# Altium PCB Altium.pcbdoc
Units mm, origin at the board's own origin, x right, y up, seen from the top; angles counter-clockwise.
Board outline 115.65 x 115.65 mm, 2 copper layers (Top Layer, Bottom Layer); 18 components, 49 nets, 83 pads, 21 vias.
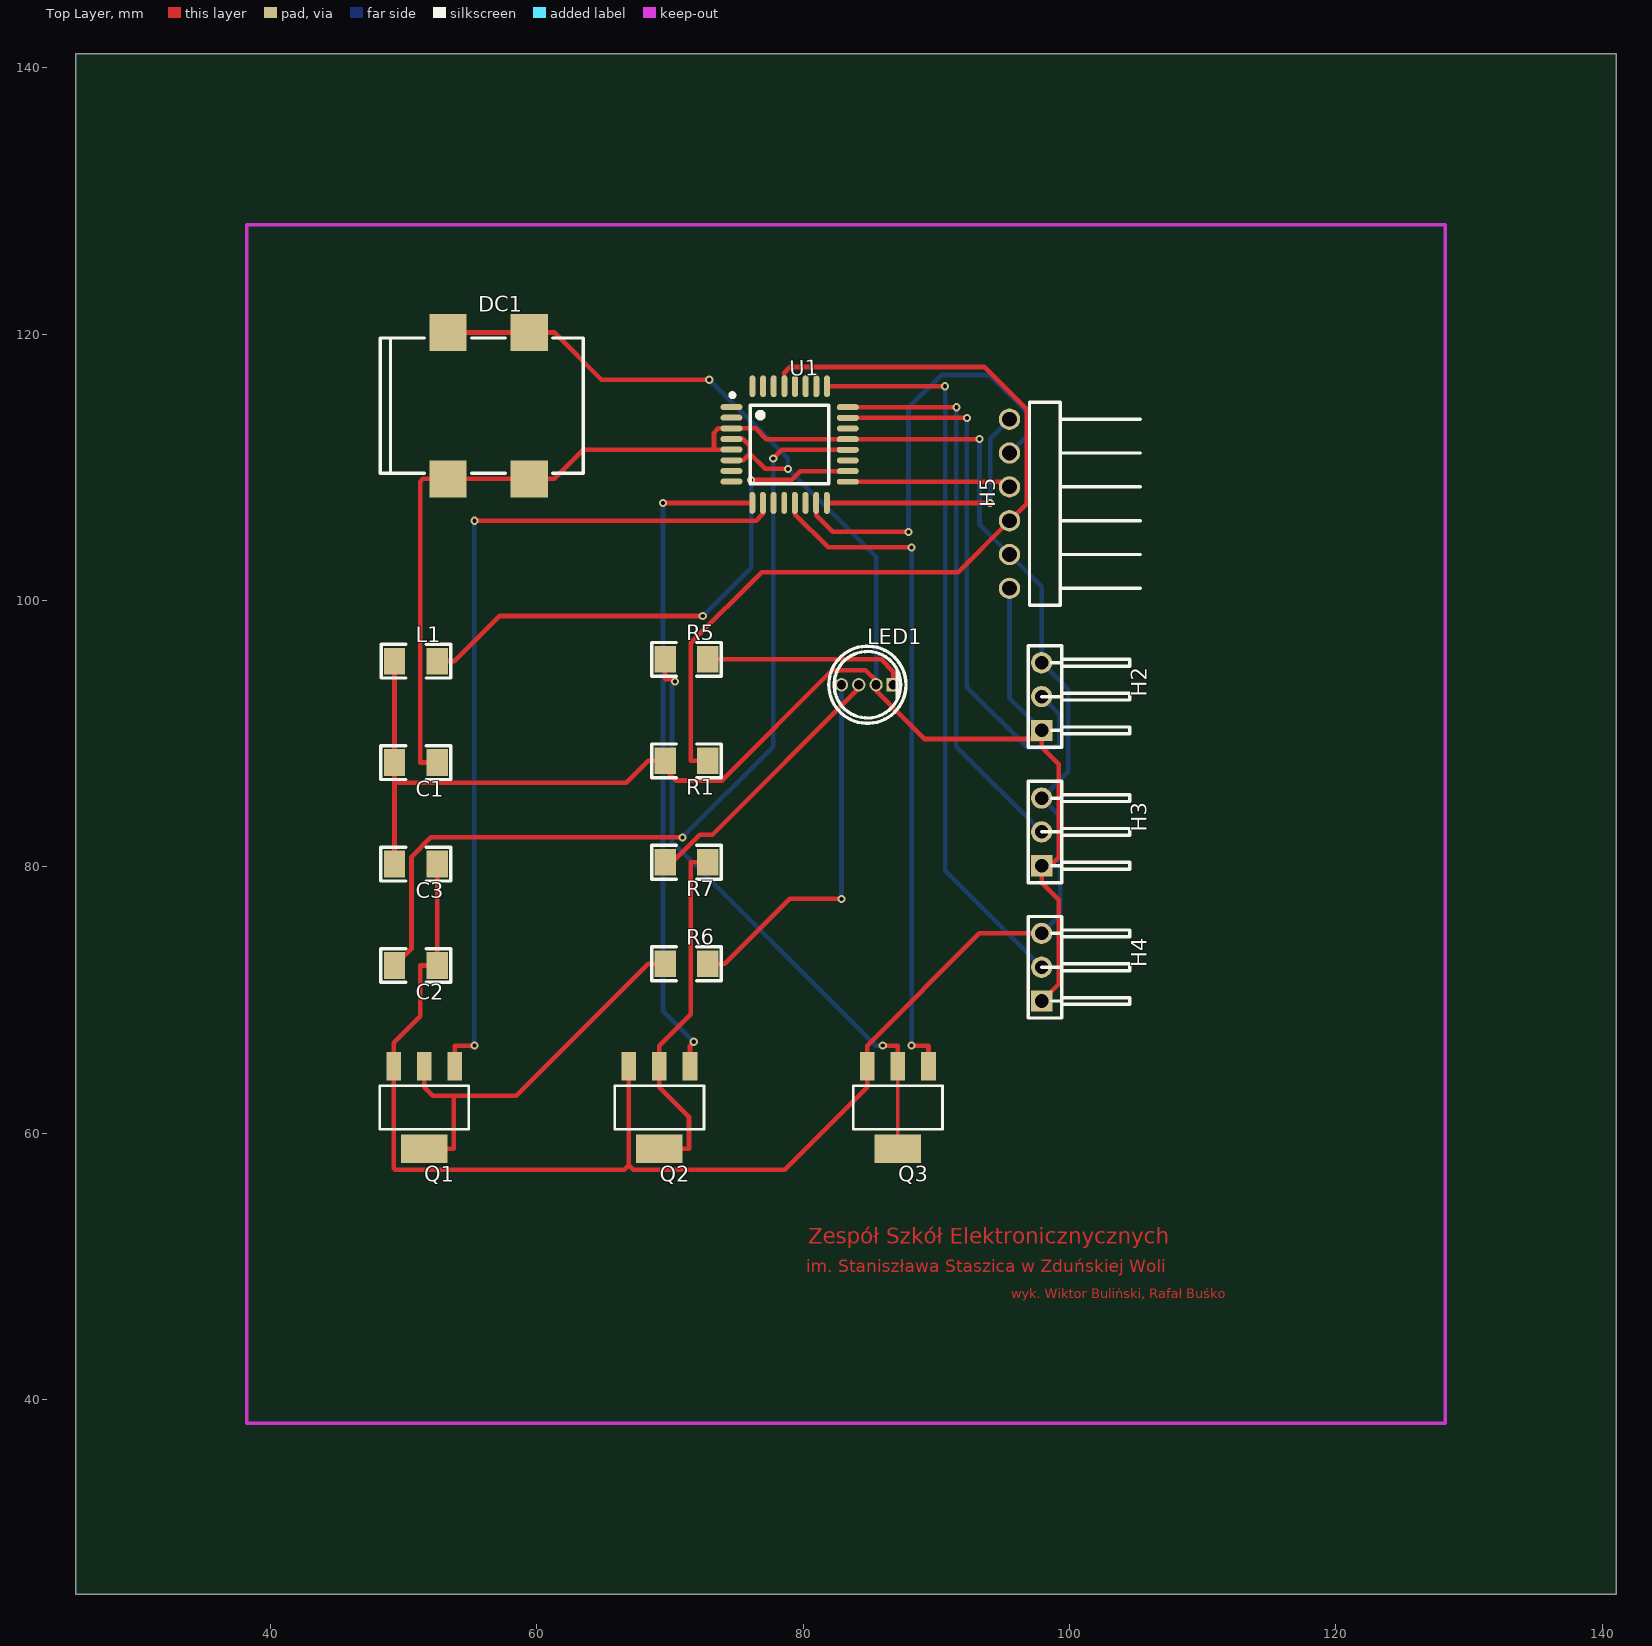
[diagram p0: Top Layer view]
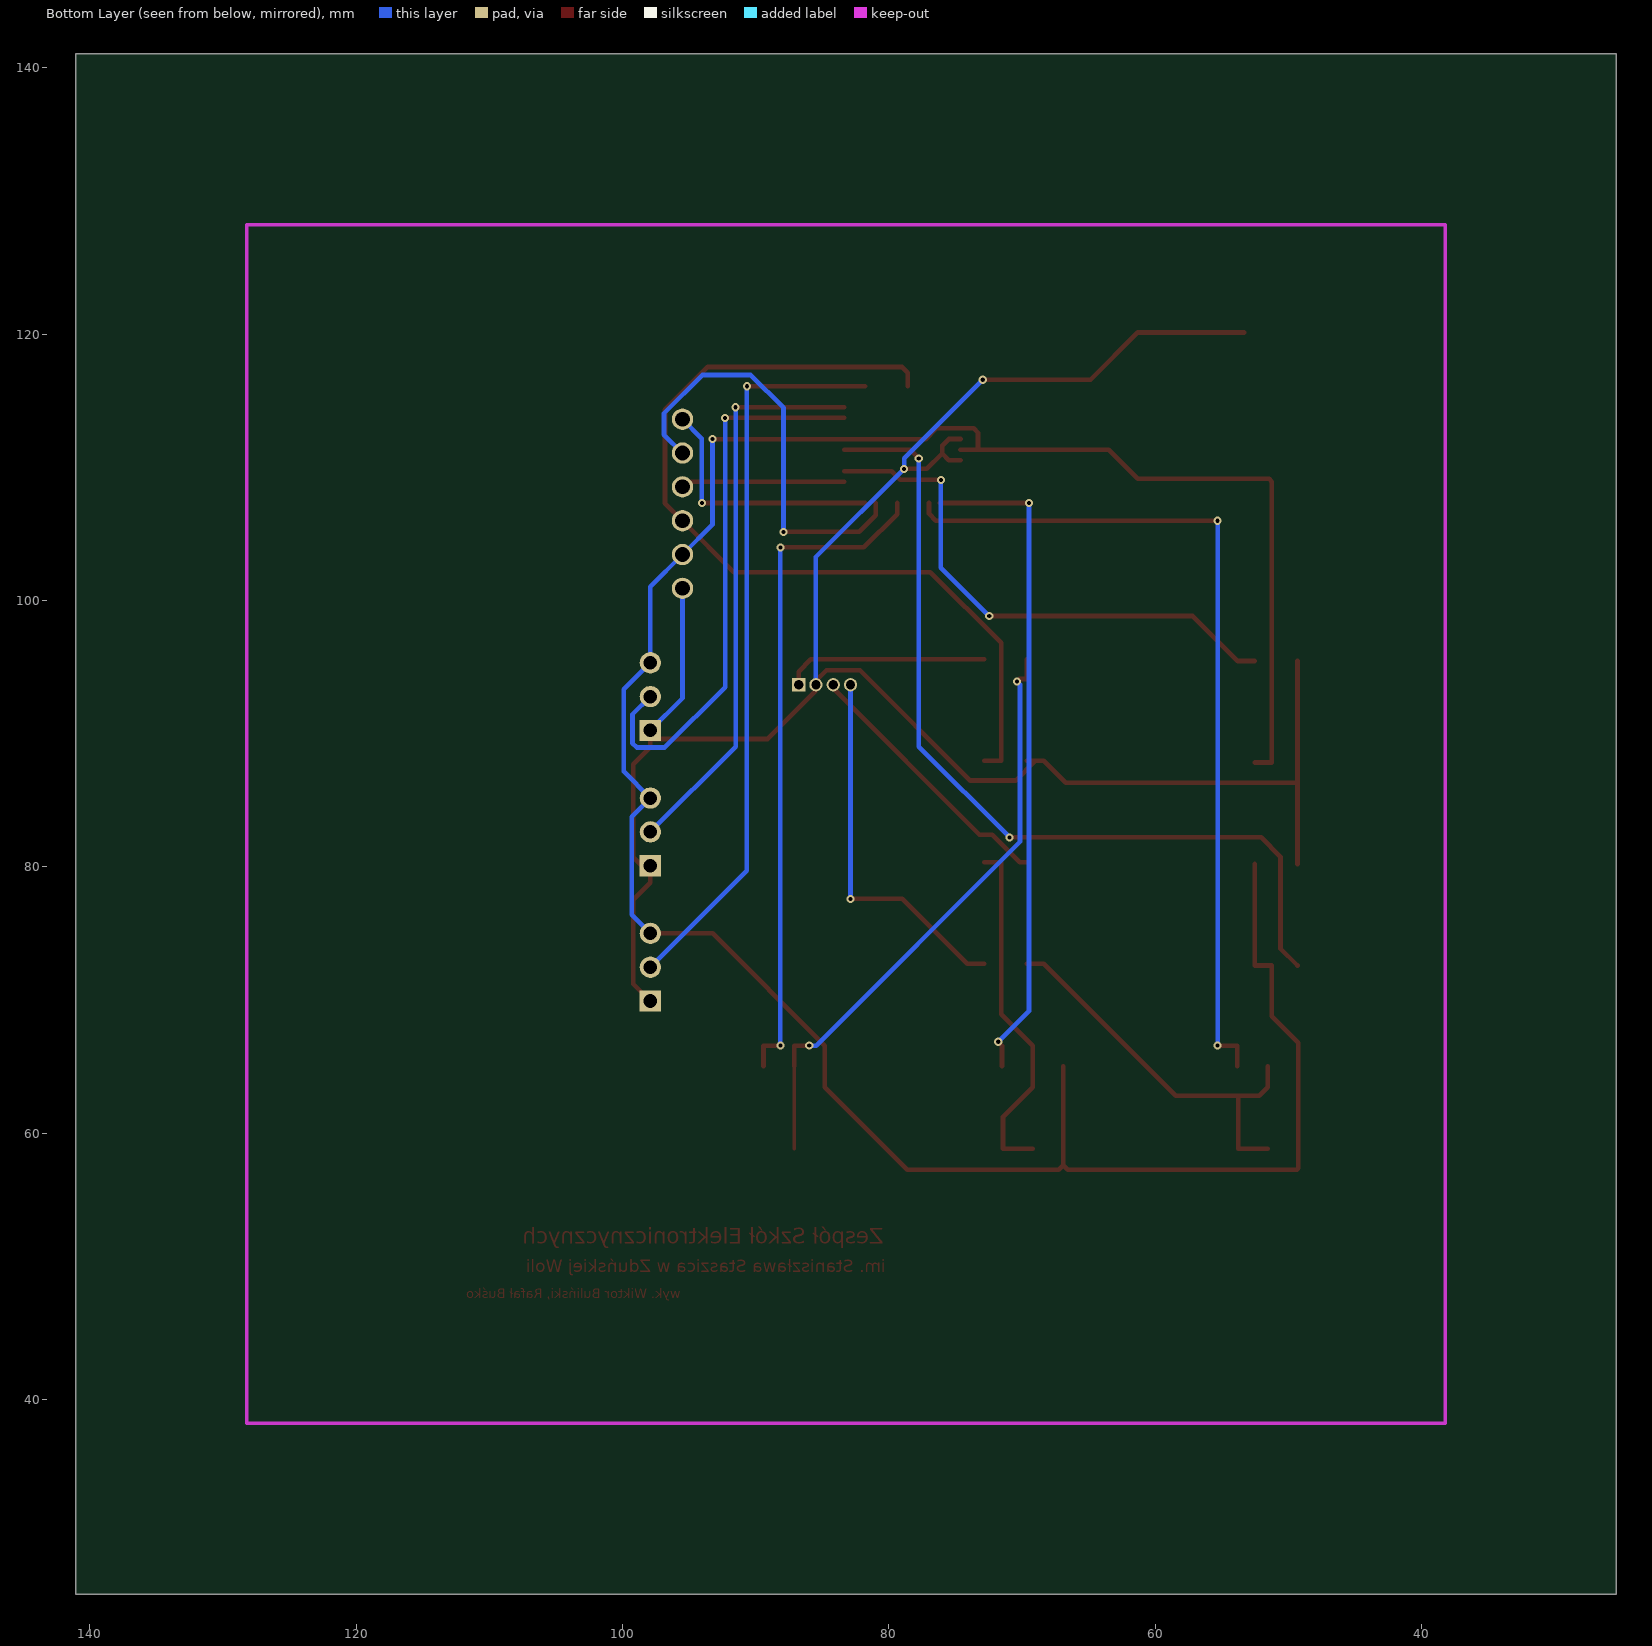
[diagram p1: Bottom Layer view, seen from below]

## Layer stack, top to bottom
Top Layer: signal copper (thickness not stored)
Dielectric: dielectric 0.32, FR-4, Dk 4.8
Bottom Layer: signal copper (thickness not stored)

## Board outline
141.054,25.4 25.4,25.4 25.4,141.054 141.054,141.054

## Components (designator, comment, footprint, x,y, rotation, side; value= is the part's Value field where it differs from the comment)
C1 "100nF" 1206 50.927,87.841 r180 top
C2 "100nF" 1206 50.927,72.601 r180 top
C3 "100nF" 1206 50.927,80.221 r180 top
DC1 "DC-005-5A-2.5-SMT" DC-005-5A-2.0-SMT 56.388,114.638 r0 top
H2 "A2541WR-3P" SIP-2.54MM-3P-CJT-H2.54 97.917,92.794 r270 top
H3 "A2541WR-3P" SIP-2.54MM-3P-CJT-H2.54 97.917,82.634 r270 top
H4 "A2541WR-3P" SIP-2.54MM-3P-CJT-H2.54 97.917,72.474 r270 top
H5 "210R-1*6PCurved needle Reverse bending Gold-plated black" HDR-2.54-1X6PW 95.504,107.272 r90 top
L1 "10uH" 1206 50.927,95.461 r0 top
LED1 "TJ-L5FYTXHMCYLCRGB-A5" LED-DIP-4P(5.8MM) 84.836,93.683 r0 top
Q1 "STN3NF06L" SOT-223 51.562,61.933 r180 top
Q2 "STN3NF06L" SOT-223 69.215,61.933 r180 top
Q3 "STN3NF06L" SOT-223 87.122,61.933 r180 top
R1 "10K" 1206 71.247,87.968 r180 top
R5 "150" 1206 71.247,95.588 r0 top
R6 "100" 1206 71.247,72.728 r0 top
R7 "100" 1206 71.247,80.348 r180 top
U1 "ATMEGA328P-AU" TQFP-32_7X7X08P 78.994,111.717 r0 top

## Footprints (in the part's own frame and the unit in brackets; to place one, negate y for a bottom-side part, rotate by r counter-clockwise, add the part's x,y. Pads: shape width x height; smd on the part's side, far side on the other; paste and mask are expansions set on the pad)
1206 [mm]
  rect 1.6x2 smd: 1(-1.6,0) 2(1.6,0)
  silkscreen extent -2.61,-1.27 2.62,1.27
DC-005-5A-2.0-SMT [mm]
  rect 2.8x2.8 smd: 1(-3.05,5.5) 1(3.05,5.5) 2(-3.05,-5.5) 3(3.05,-5.5)
  silkscreen extent -8.13,-5.08 7.11,5.08
HDR-2.54-1X6PW [mm]
  round 1.6 hole 1.1: 1(-6.35,0) 2(-3.81,0) 3(-1.27,0) 4(1.27,0) 5(3.81,0) 6(6.35,0)
  silkscreen extent -7.62,-9.81 7.62,-1.5
LED-DIP-4P(5.8MM) [mm]
  rect 1x1 hole 0.7: 1(1.95,0)
  round 1 hole 0.7: 2(0.65,0) 3(-0.65,0) 4(-1.95,0)
  silkscreen extent -2.9,-2.9 2.9,2.9
SIP-2.54MM-3P-CJT-H2.54 [mm]
  rect 1.6x1.6 hole 1.02: 1(2.54,0)
  round 1.6 hole 1.02: 2(0,0) 3(-2.54,0)
  silkscreen extent -3.81,-1.02 3.81,6.6
SOT-223 [mil]
  rect 43x85 smd: 1(-90.5,-122) 2(0.5,-122) 3(90.5,-122)
  rect 138x85 smd: 4(0.5,122)
  silkscreen extent -132,-64 132,64
TQFP-32_7X7X08P [mm]
  oval 1.65x0.45 smd: 1(-4.369,2.817) 2(-4.369,2.017) 3(-4.369,1.217) 4(-4.369,0.417) 5(-4.369,-0.381) 6(-4.369,-1.181) 7(-4.369,-1.981) 8(-4.369,-2.781) 17(4.369,-2.791) 18(4.369,-1.991) 19(4.369,-1.191) 20(4.369,-0.391) 21(4.369,0.406) 22(4.369,1.206) 23(4.369,2.007) 24(4.369,2.807)
  oval 0.45x1.65 smd: 9(-2.804,-4.381) 10(-2.004,-4.381) 11(-1.204,-4.381) 12(-0.404,-4.381) 13(0.394,-4.381) 14(1.194,-4.381) 15(1.994,-4.381) 16(2.794,-4.381) 25(2.804,4.381) 26(2.004,4.381) 27(1.204,4.381) 28(0.404,4.381) 29(-0.394,4.381) 30(-1.194,4.381) 31(-1.994,4.381) 32(-2.794,4.381)
  silkscreen extent -4.45,-2.94 2.95,3.86

## Via types
v1: diameter 0.61, hole 0.31, Top Layer to Bottom Layer, 21 vias

## Nets (pads, with @x,y where several pads share a name; then routed paths per layer and width w, separated by ;. In a path a pad name is that pad's centre, name@x,y a point inside that pad or via, vN(x,y) a via of type N, cw(c..) or ccw(c..) an arc to the next point about the centre after c; other vN are vias at no path point)
GND: C1.1 C2.1 C3.1 DC1.2 DC1.3 H2.3 H3.3 H4.3 H5.2 Q1.3 Q2.3 Q3.3 U1.3 U1.5 U1.21 | length 200.8
  Top Layer w0.35: C3.1 C2.1 51.25,72.601 51.25,68.783 49.263,66.797 Q1.3 49.263,57.379 49.365,57.277 66.581,57.277 66.916,57.612 ; C1.1 51.25,87.841 51.25,108.926 51.46,109.139 DC1.2 DC1.3 61.316,109.139 63.513,111.336 73.315,111.336 ; Q2.3 66.916,64.252 66.916,57.612 ; U1.5 73.315,111.336 ; v1(93.246,112.123) U1.21 77.254,112.123 76.444,112.934 U1.3 73.642,112.934 73.315,112.606 73.315,111.336 ; H4.3 93.248,75.014 84.823,66.589 84.823,65.646 Q3.3 84.823,63.475 78.626,57.277 67.252,57.277 66.916,57.612
  Bottom Layer w0.35: v1(93.246,112.123) 93.246,105.72 H5.2 97.917,101.049 H2.3 99.916,93.335 99.916,87.173 H3.3 99.327,83.764 99.327,76.424 H4.3
LED1_1: LED1.1 R5.2 | length 15.3
  Top Layer w0.35: R5.2 85.86,95.588 86.787,94.661 LED1.1
LED1_3: LED1.3 R7.2 | length 20.2
  Top Layer w0.35: R7.2 70.175,80.348 72.25,82.423 73.203,82.423 84.186,93.409 LED1.3
LED1_4: LED1.4 R6.2 | length 28.1
  Top Layer w0.35: R6.2 74.125,72.728 78.999,77.602 v1(82.885,77.602)
  Bottom Layer w0.35: v1(82.885,77.602) LED1.4
Q1_2: Q1.2 Q1.4 R6.1 | length 30.2
  Top Layer w0.35: Q1.4 53.779,58.834 53.779,62.822 ; Q1.2 51.549,63.475 52.202,62.822 53.779,62.822 ; R6.1 68.369,72.728 58.463,62.822 53.779,62.822
Q2_2: Q2.2 Q2.4 R7.1 | length 26.9
  Top Layer w0.35: Q2.4 71.432,58.834 71.432,61.245 69.202,63.475 Q2.2 69.202,65.809 69.202,66.589 71.57,68.956 71.57,80.348 R7.1
Q3_2: Q3.2 Q3.4 R5.1 | length 45.5
  Top Layer w0.25: Q3.4 Q3.2
  Top Layer w0.35: R5.1 69.647,94.11 70.206,94.11 v1(70.386,93.929) ; v1(85.987,66.589) 87.109,66.589 Q3.2
  Bottom Layer w0.35: v1(70.386,93.929) 70.16,93.701 70.16,81.897 85.468,66.589 v1(85.987,66.589)
S$44: 
S$45: 
S$47: 
S$49: 
S$51: 
S$53: 
S$67: 
S$71: 
S$77: 
S$79: 
S$83: 
S$85: 
S$87: 
S$89: 
U1_1: U1.1
U1_2: U1.2
U1_7: U1.7
U1_8: U1.8
U1_9: Q2.1 U1.9 | length 50.1
  Top Layer w0.35: v1(69.482,107.335) U1.9 ; Q2.1 71.514,66.589 v1(71.798,66.873)
  Bottom Layer w0.35: v1(69.482,107.335) 69.482,69.19 v1(71.798,66.873)
U1_10: Q1.1 U1.10 | length 65.1
  Top Layer w0.35: Q1.1 53.861,66.589 v1(55.321,66.589) ; v1(55.321,105.999) 76.479,105.999 76.99,106.513 U1.10
  Bottom Layer w0.35: v1(55.321,66.589) v1(55.321,105.999)
U1_11: U1.11
U1_12: U1.12
U1_13: Q3.1 U1.13 | length 50.9
  Top Layer w0.35: U1.13 79.388,106.487 81.882,103.995 v1(88.153,103.995) ; v1(88.153,66.589) 89.421,66.589 Q3.1
  Bottom Layer w0.35: v1(88.153,66.589) v1(88.153,103.995)
U1_14: U1.14
U1_15: H5.5 U1.15 | length 32.4
  Top Layer w0.35: U1.15 80.988,106.406 82.233,105.164 v1(87.914,105.164)
  Bottom Layer w0.35: v1(87.914,105.164) 87.914,114.475 90.376,116.937 94.01,116.937 96.896,114.051 96.896,112.471 H5.5
U1_16: H5.6 U1.16 | length 19.2
  Top Layer w0.35: U1.16 v1(94.051,107.335)
  Bottom Layer w0.35: v1(94.051,107.335) 94.051,112.169 H5.6
U1_17: H5.4 U1.17 | length 12.3
  Top Layer w0.35: U1.17 95.12,108.926 H5.4
U1_18: L1.2 U1.18 | length 40.6
  Top Layer w0.35: L1.2 53.805,95.461 57.186,98.842 v1(72.471,98.842) ; v1(76.103,109.068) 79.144,109.068 79.799,109.726 U1.18
  Bottom Layer w0.35: v1(72.471,98.842) 76.103,102.474 v1(76.103,109.068)
U1_19: U1.19
U1_20: C2.2 U1.20 | length 66.8
  Top Layer w0.35: C2.2 50.604,73.879 50.604,80.78 52.047,82.223 v1(70.942,82.223) ; v1(77.762,110.678) 78.41,111.326 U1.20
  Bottom Layer w0.35: v1(70.942,82.223) 77.762,89.042 v1(77.762,110.678)
U1_22: U1.22
U1_23: H2.2 U1.23 | length 42.2
  Top Layer w0.35: U1.23 v1(92.304,113.724)
  Bottom Layer w0.35: v1(92.304,113.724) 92.304,93.5 96.827,88.976 98.936,88.976 99.263,89.301 99.263,91.448 H2.2
U1_24: H3.2 U1.24 | length 42.7
  Top Layer w0.35: U1.24 v1(91.516,114.524)
  Bottom Layer w0.35: v1(91.516,114.524) 91.516,89.035 H3.2
U1_25: H4.2 U1.25 | length 55.5
  Top Layer w0.35: U1.25 v1(90.668,116.098)
  Bottom Layer w0.35: v1(90.668,116.098) 90.668,79.723 H4.2
U1_26: U1.26
U1_27: U1.27
U1_28: U1.28
U1_29: H5.3 R1.1 U1.29 | length 67.5
  Top Layer w0.35: R1.1 71.57,87.968 71.57,96.822 76.888,102.141 91.643,102.141 H5.3 96.822,107.318 96.822,114.323 93.599,117.546 79.027,117.546 78.6,117.12 U1.29
U1_30: U1.30
U1_31: U1.31
U1_32: U1.32
VCC: C1.2 C3.2 DC1.1 H2.1 H3.1 H4.1 H5.1 L1.1 LED1.2 R1.2 U1.4 U1.6 | length 162.8
  Top Layer w0.35: C3.2 49.327,86.314 ; L1.1 C1.2 49.327,86.314 ; DC1.1@53.337,120.137 59.439,120.137 61.316,120.137 64.867,116.586 v1(72.962,116.586) ; R1.2 R1.2@69.009,87.968 ; U1.6 75.496,110.536 76.01,111.049 ; U1.4 75.517,112.134 76.01,111.643 76.01,111.049 ; v1(78.864,109.896) 77.16,109.896 76.01,111.049 ; H4.1 99.195,71.212 99.195,77.539 97.917,78.816 H3.1@97.917,79.454 ; H3.1 H3.1@97.917,79.454 ; H2.1 H2.1@97.917,89.614 ; 49.327,86.314 66.716,86.314 68.369,87.968 R1.2@69.009,87.968 ; R1.2@69.009,87.968 70.485,86.49 73.896,86.49 82.174,94.768 84.691,94.768 85.486,93.973 LED1.2 85.486,93.226 89.096,89.614 H2.1@97.917,89.614 ; H3.1@97.917,79.454 99.195,80.732 99.195,87.699 97.917,88.976 H2.1@97.917,89.614
  Bottom Layer w0.35: v1(72.962,116.586) 78.864,110.683 v1(78.864,109.896) 85.486,103.274 LED1.2 ; H5.1 95.504,92.667 H2.1

## Other copper
Top Layer:
  text "Zespół Szkół Elektronicznycznych" at 80.378,51.295 h2.03
  text "im. Staniszława Staszica w Zduńskiej Woli" at 80.251,49.215 h1.6
  text "wyk. Wiktor Buliński, Rafał Buśko" at 95.623,47.346 h1.2

## Silkscreen, mask and mechanical layers (free items; w line width, h text height)
Document:
  lines w0.003: 83.202,83.202 83.252,83.252